# EAGLE board expansion_rxtx (EAGLE 5.11)
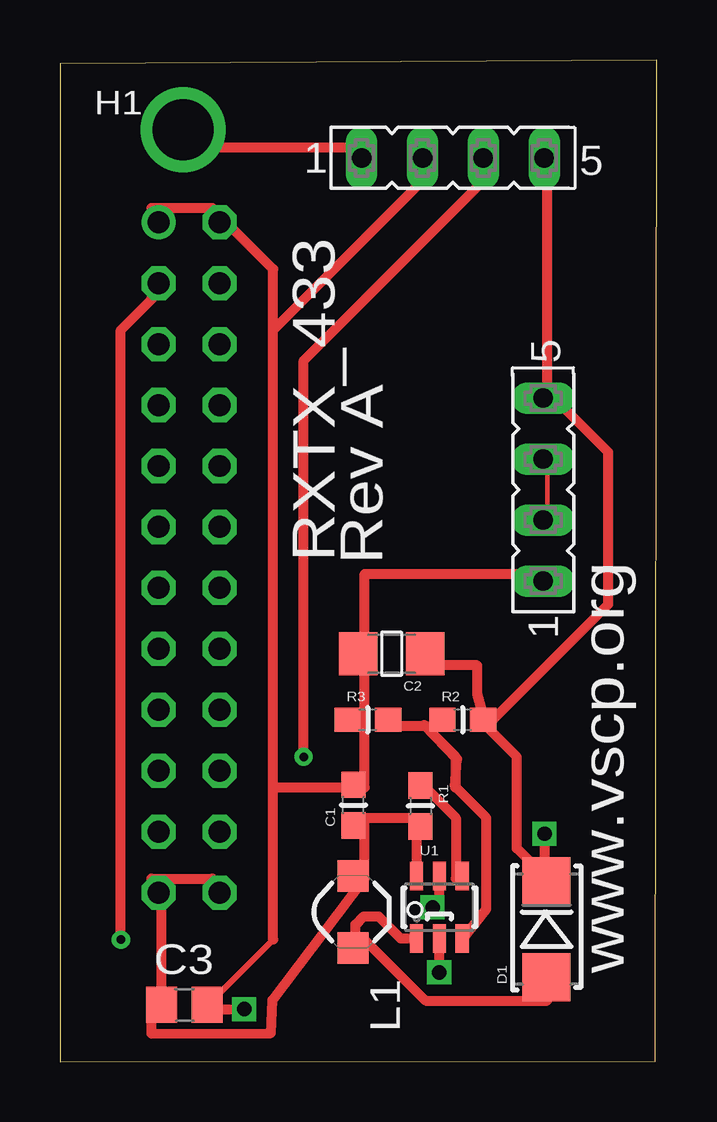
[diagram p0: board, top side]
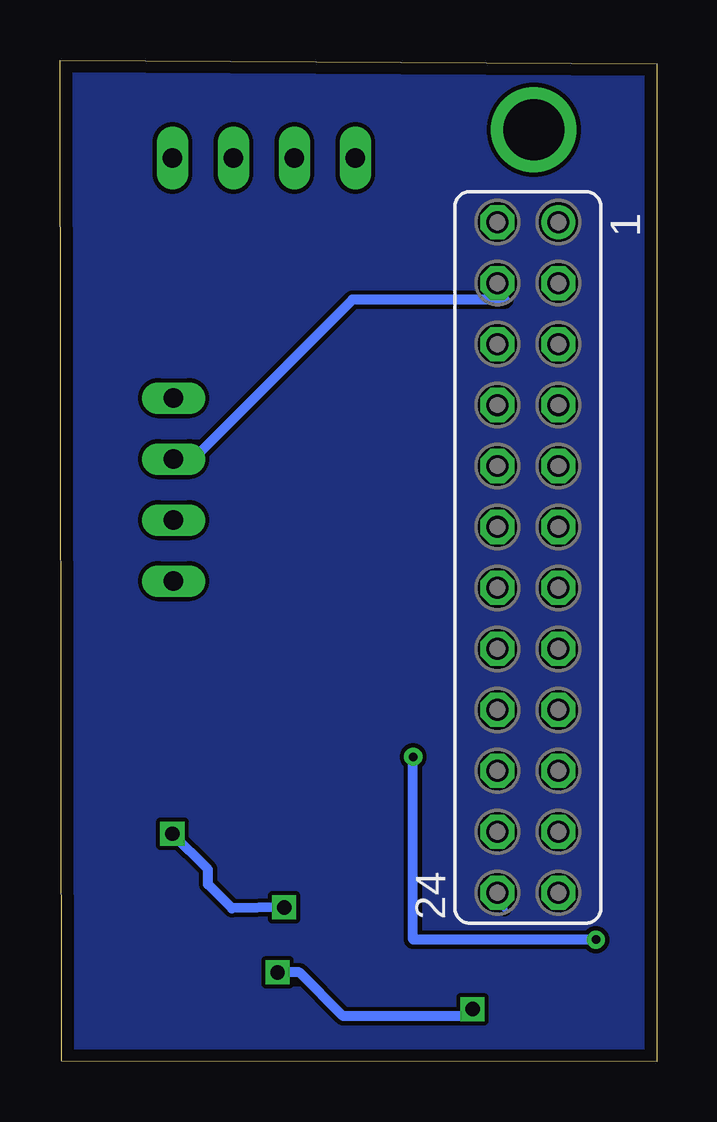
[diagram p1: board, bottom side, seen from below]

Size 24.89 x 41.73 mm. Coordinates in mm from the lower left corner, seen from the top.
Outline: 0,0 24.82,0.01 24.89,41.73 0,41.58 0,0
Copper layers (1*16): Top 0.0356mm / dielectric 1.5011mm / Bottom 0.0356mm
Design rules "SilverCircuits": minimum track width 7mil, minimum drill 14mil, track to track 7mil, track to pad 7mil, pad to pad 7mil, via to via 7mil, smd to smd 0mil, copper to edge 20mil, drill to drill 8mil, minimum pad ring 10mil, minimum via ring 8mil, stop-mask expansion 4mil, vias tented up to drill 0mil, thermal gap 10mil

## Footprints (pad centres in the part's own frame; a part is rotated, then mirrored left to right if it is on the bottom)
0603 = smd 1.1 x 1: 1 -0.85,0; 2 0.85,0
1206 = smd 1.6 x 1.8: 1 -1.4,0; 2 1.4,0
C0805 = smd 1.3 x 1.5: 1 -0.95,0; 2 0.95,0
SMA-DIODE = smd 2 x 2: A -2,0; C 2,0
PAD_0.1000 = drill 2.54 pad 2.54 round: 1 0,0
FE12-2 = drill 0.914 round: 1 -13.97,1.27 | drill 0.914 octagon: 2 -13.97,-1.27; 3 -11.43,1.27; 4 -11.43,-1.27; 5 -8.89,1.27; 6 -8.89,-1.27; 7 -6.35,1.27; 8 -6.35,-1.27; 9 -3.81,1.27; 10 -3.81,-1.27; 11 -1.27,1.27; 12 -1.27,-1.27; 13 1.27,1.27; 14 1.27,-1.27; 15 3.81,1.27; 16 3.81,-1.27; 17 6.35,1.27; 18 6.35,-1.27; 19 8.89,1.27; 20 8.89,-1.27; 21 11.43,1.27; 22 11.43,-1.27; 23 13.97,1.27; 24 13.97,-1.27
1_3X1_3 = smd 1.3 x 1.3: P$1 -1.5,0; P$2 1.5,0
SOT23-6 = smd 0.55 x 1.2: 1 -0.95,-1.3; 2 0,-1.3; 3 0.95,-1.3; 4 0.95,1.3; 5 0,1.3; 6 -0.95,1.3
FOUR = drill 0.813 long: 1 2.54,0; 2 5.08,0; 3 7.62,0; 4 10.16,0

## Placement (x,y rotation side)
C1  10uF  [0603]  12.24,10.68 90 top
C2  22uF  [1206]  13.83,16.99 180 top
C3  100n  [C0805]  5.19,2.36 0 top
D1  MBRA210LT3G  [SMA-DIODE]  20.29,5.52 90 top
H1  Antenna  [PAD_0.1000]  5.13,38.83 0 top
JP1  [FE12-2]  5.38,21.01 270 bottom
L1  2.2uH  [1_3X1_3]  12.22,6.24 270 top
R1  1M  [0603]  15.03,10.65 270 top
R2  95.3K  [0603]  16.8,14.24 0 top
R3  30.9K  [0603]  12.84,14.24 0 top
U1  LTC3426  [SOT23-6]  15.82,6.43 0 top
U$1  TX433_MODULE  [FOUR]  10.04,37.65 0 top
U$2  RX433_MODULE  [FOUR]  20.15,17.48 90 top

## Library data of the parts
C1 C2 L1 R1-R3 = CH_passive
C3 = rcl
D1 = CH_semiconductors
H1 = special-drill
JP1 = con-lsta; OC_FARNELL: unknown; OC_NEWARK: unknown
U1 = CH_Linear_technology
U$1 U$2 = miwi

## Nets
+3V3: C1.1 C3.1 JP1.23 JP1.24 L1.P$1 R1.2 U1.6
+5V: C2.1 D1.C R2.2 U1.5 U$1.4 U$2.4
GND: C1.2 C2.2 C3.2 JP1.1 JP1.2 R3.1 U1.2 U$1.2 U$2.1
N$2: D1.A L1.P$2 U1.1
N$3: R1.1 U1.4
N$4: H1.1 U$1.1
N$5: JP1.14
N$7: JP1.6
N$9: JP1.22
N$10: JP1.20
N$11: JP1.7
N$12: JP1.16
N$13: JP1.5
N$14: JP1.12
N$15: JP1.10
N$16: JP1.8
N$18: JP1.18
N$21: JP1.21
N$22: JP1.19
N$23: JP1.17
N$24: JP1.15
N$25: JP1.13
N$26: JP1.11
N$27: JP1.9
N$28: R2.1 R3.2 U1.3
RX: JP1.3 U$1.3
TX: JP1.4 U$2.2 U$2.3

## Tracks (layer width: path | path; a pad name or v marks a point on that pad's centre or on a via)
+3V3
  Top 0.178: 15.24,10.16 R1.2 | 12.7,10.16 C1.1 | 12.7,7.62 L1.P$1 | C3.1 3.81,2.54
  Top 0.406: C3.1 4.24,7.04 JP1.23 3.81,7.62 6.35,7.62 JP1.24 | 15.24,10.16 12.7,10.16 12.7,7.62 8.86,2.56 8.8,1.19 3.81,1.17 3.81,2.54 | U1.6 14.87,9.65 R1.2
  Bottom 0.254: JP1.24 6.35,6.35
+5V  (via drill 0.6)
  Top 0.178: 20.32,36.83 U$1.4 | 15.24,16.51 C2.1 | D1.C 20.32,7.62 | 20.32,27.94 U$2.4 | 17.78,13.97 R2.2
  Top 0.406: 20.32,36.83 20.32,27.94 22.86,25.4 22.86,19.05 17.78,13.97 | 17.78,13.97 17.4,15.31 17.4,16.51 15.24,16.51 | 20.32,7.62 19.05,8.89 19.05,12.7 17.78,13.97 | U1.5 15.82,6.68 v15.54,6.43 | v20.2,9.49 20.2,7.61 D1.C
  Bottom 0.406: v15.54,6.43 17.72,6.39 18.72,7.39 18.72,8.01 v20.2,9.49
GND  (via drill 0.6)
  Top 0.178: 12.7,16.51 C2.2 12.7,17.78 | 12.7,11.43 C1.2 | 19.05,20.32 U$2.1 | 15.24,36.83 U$1.2
  Top 0.254: 8.89,5.08 6.35,2.54 C3.2 | 3.81,35.56 JP1.1 | 6.35,35.56 JP1.2
  Top 0.406: 8.89,5.08 8.89,11.43 | 8.89,11.43 8.89,30.48 | 8.89,30.48 8.89,33.02 6.35,35.56 3.81,35.56 | 8.89,11.43 12.7,11.43 12.7,14.22 | 12.7,14.22 12.7,16.51 | 19.05,20.32 12.7,20.32 12.7,17.78 | 8.89,30.48 15.24,36.83 | U1.2 v15.81,3.72 | v7.68,2.19 6.32,2.19 C3.2 | R3.1 12.68,14.24 12.7,14.22
  Bottom 0.406: v15.81,3.72 14.91,3.72 13.08,1.9 7.98,1.9 v7.68,2.19
N$1
  pour Bottom: 0.28,41.29 0.25,41.29 0.25,0.08 24.44,0.38 24.66,0.97 24.98,0.29 24.98,41.49 0.51,41.37 0.51,40.95
N$2
  Top 0.178: L1.P$2 12.7,5.08 | 20.32,2.54 D1.A
  Top 0.406: 12.7,5.08 15.24,2.54 20.32,2.54 | U1.1 14.2,5.13 13.28,6.05 12.66,6.05 12.32,5.71 12.32,4.83 L1.P$2
N$3
  Top 0.178: R1.1 15.24,11.43 | 16.51,7.62 U1.4
  Top 0.406: 15.24,11.43 16.51,10.16 16.51,7.62
N$4
  Top 0.178: 12.7,38.1 U$1.1
  Top 0.406: 12.7,38.1 6.35,38.1 H1.1
N$28
  Top 0.178: 13.97,13.97 R3.2 | 16.73,5.03 U1.3
  Top 0.406: 16.51,11.43 16.47,11.43 16.55,12.6 15.19,14.03 | 16.51,11.43 17.78,10.16 17.78,6.35 16.73,5.03 | 15.24,13.97 13.97,13.97 | 15.24,13.97 15.68,13.97 R2.1 | 15.24,13.97 16.51,12.7 16.51,11.43
RX  (via drill 0.36)
  Top 0.178: 17.78,36.83 U$1.3
  Top 0.406: 17.78,36.83 10.16,29.21 v10.16,12.7 | v2.54,5.08 2.54,30.48 3.81,31.75 JP1.3
  Bottom 0.406: v10.16,12.7 10.16,5.08 v2.54,5.08
TX
  Top 0.178: U$2.2 20.32,22.86 20.32,25.4 U$2.3
  Bottom 0.178: 19.05,25.4 U$2.3
  Bottom 0.406: 19.05,25.4 12.7,31.75 6.35,31.75 JP1.4

## Text on the board
tNames: RXTX_433 | Rev A | www.vscp.org